# Altium PCB pcb-sensor-AD5933.PcbDoc
Units mm, origin at the board's own origin, x right, y up, seen from the top; angles counter-clockwise.
Board outline 53.59 x 49.4 mm, 2 copper layers (Top Layer, Bottom Layer); 28 components, 19 nets, 94 pads, 24 vias.
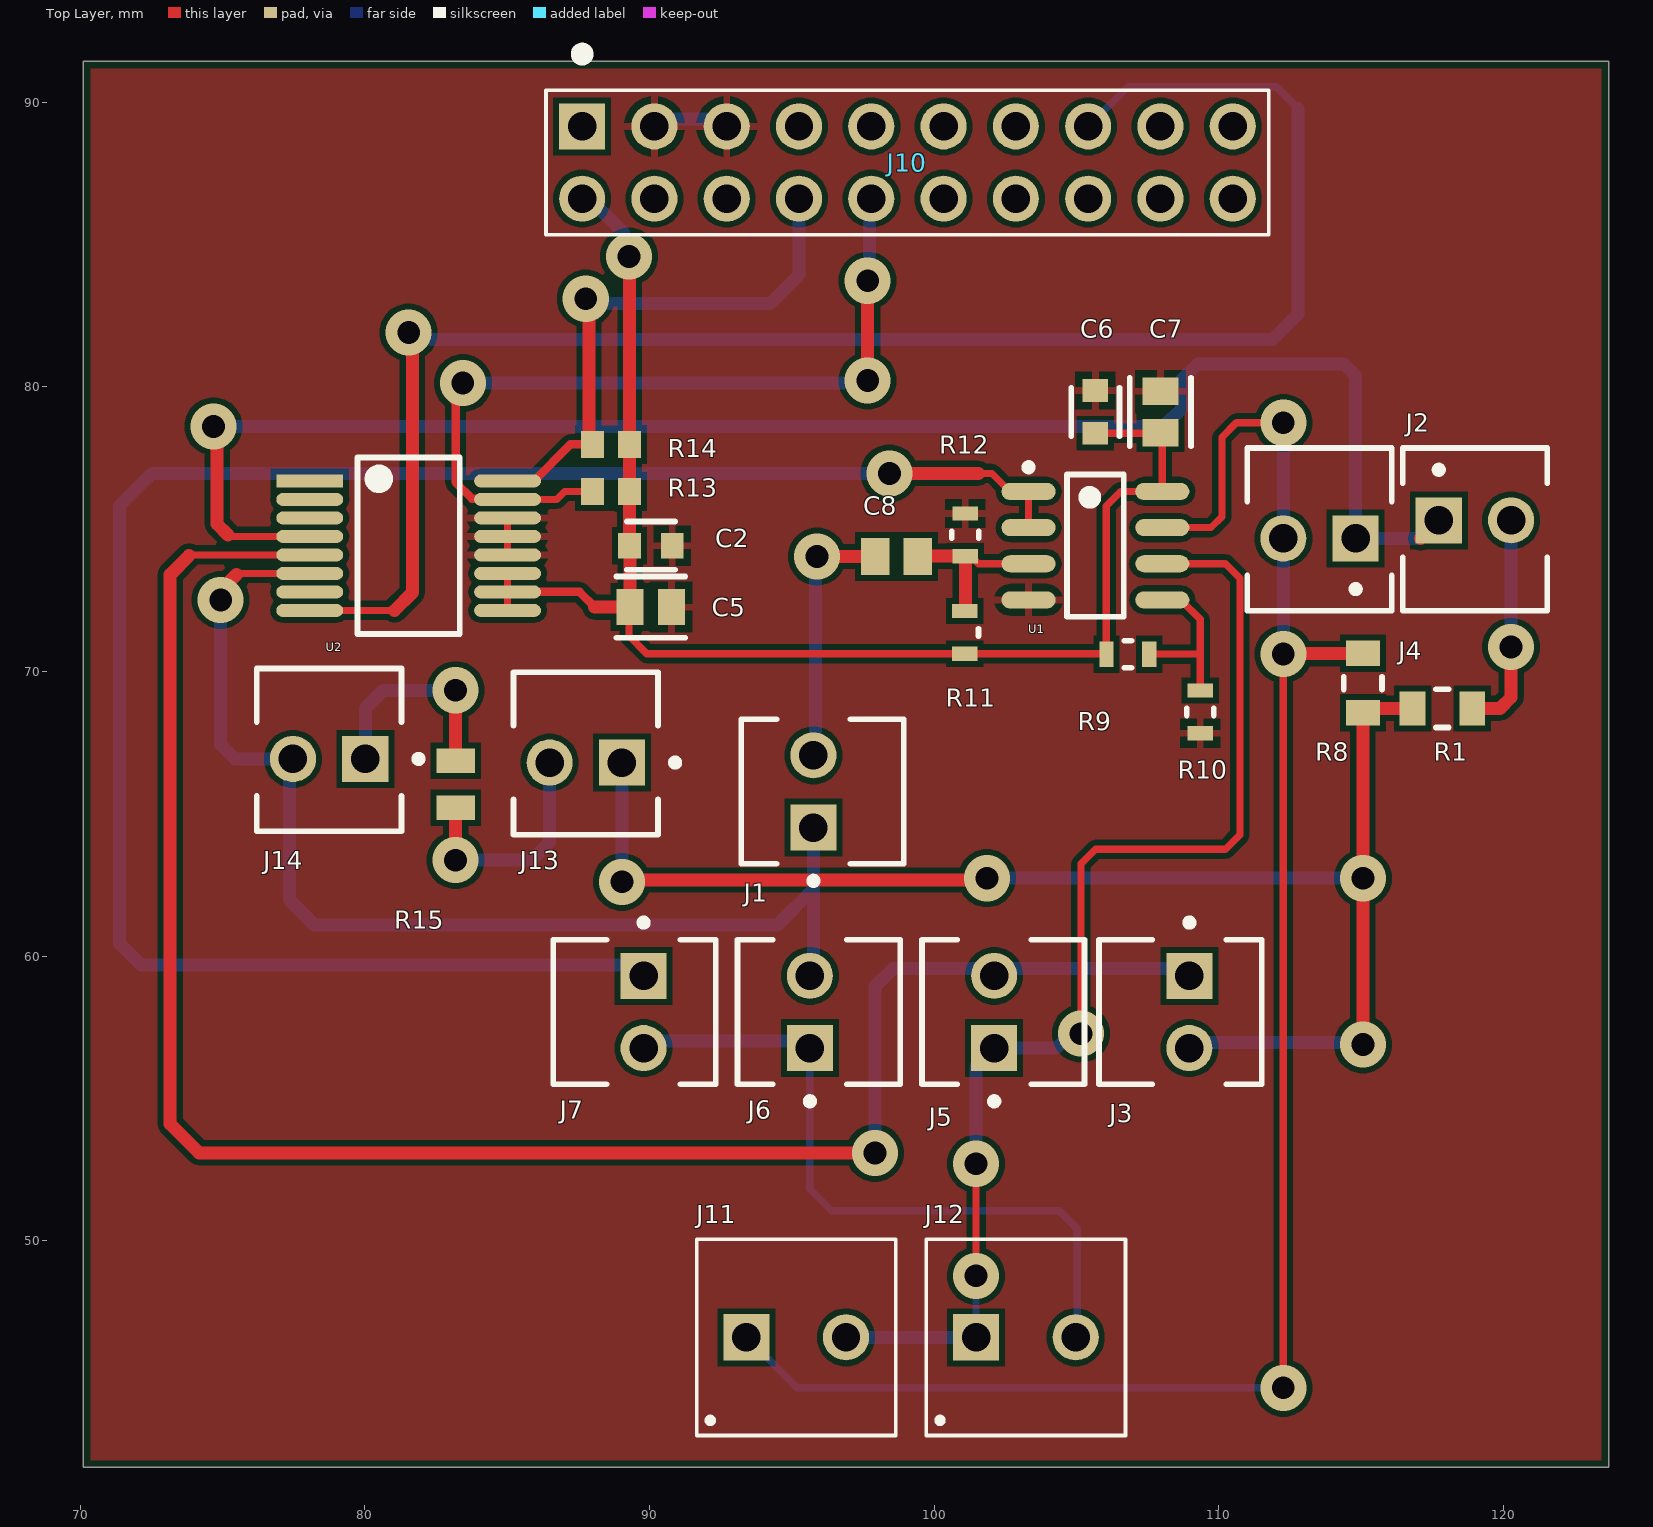
[diagram p0: Top Layer view]
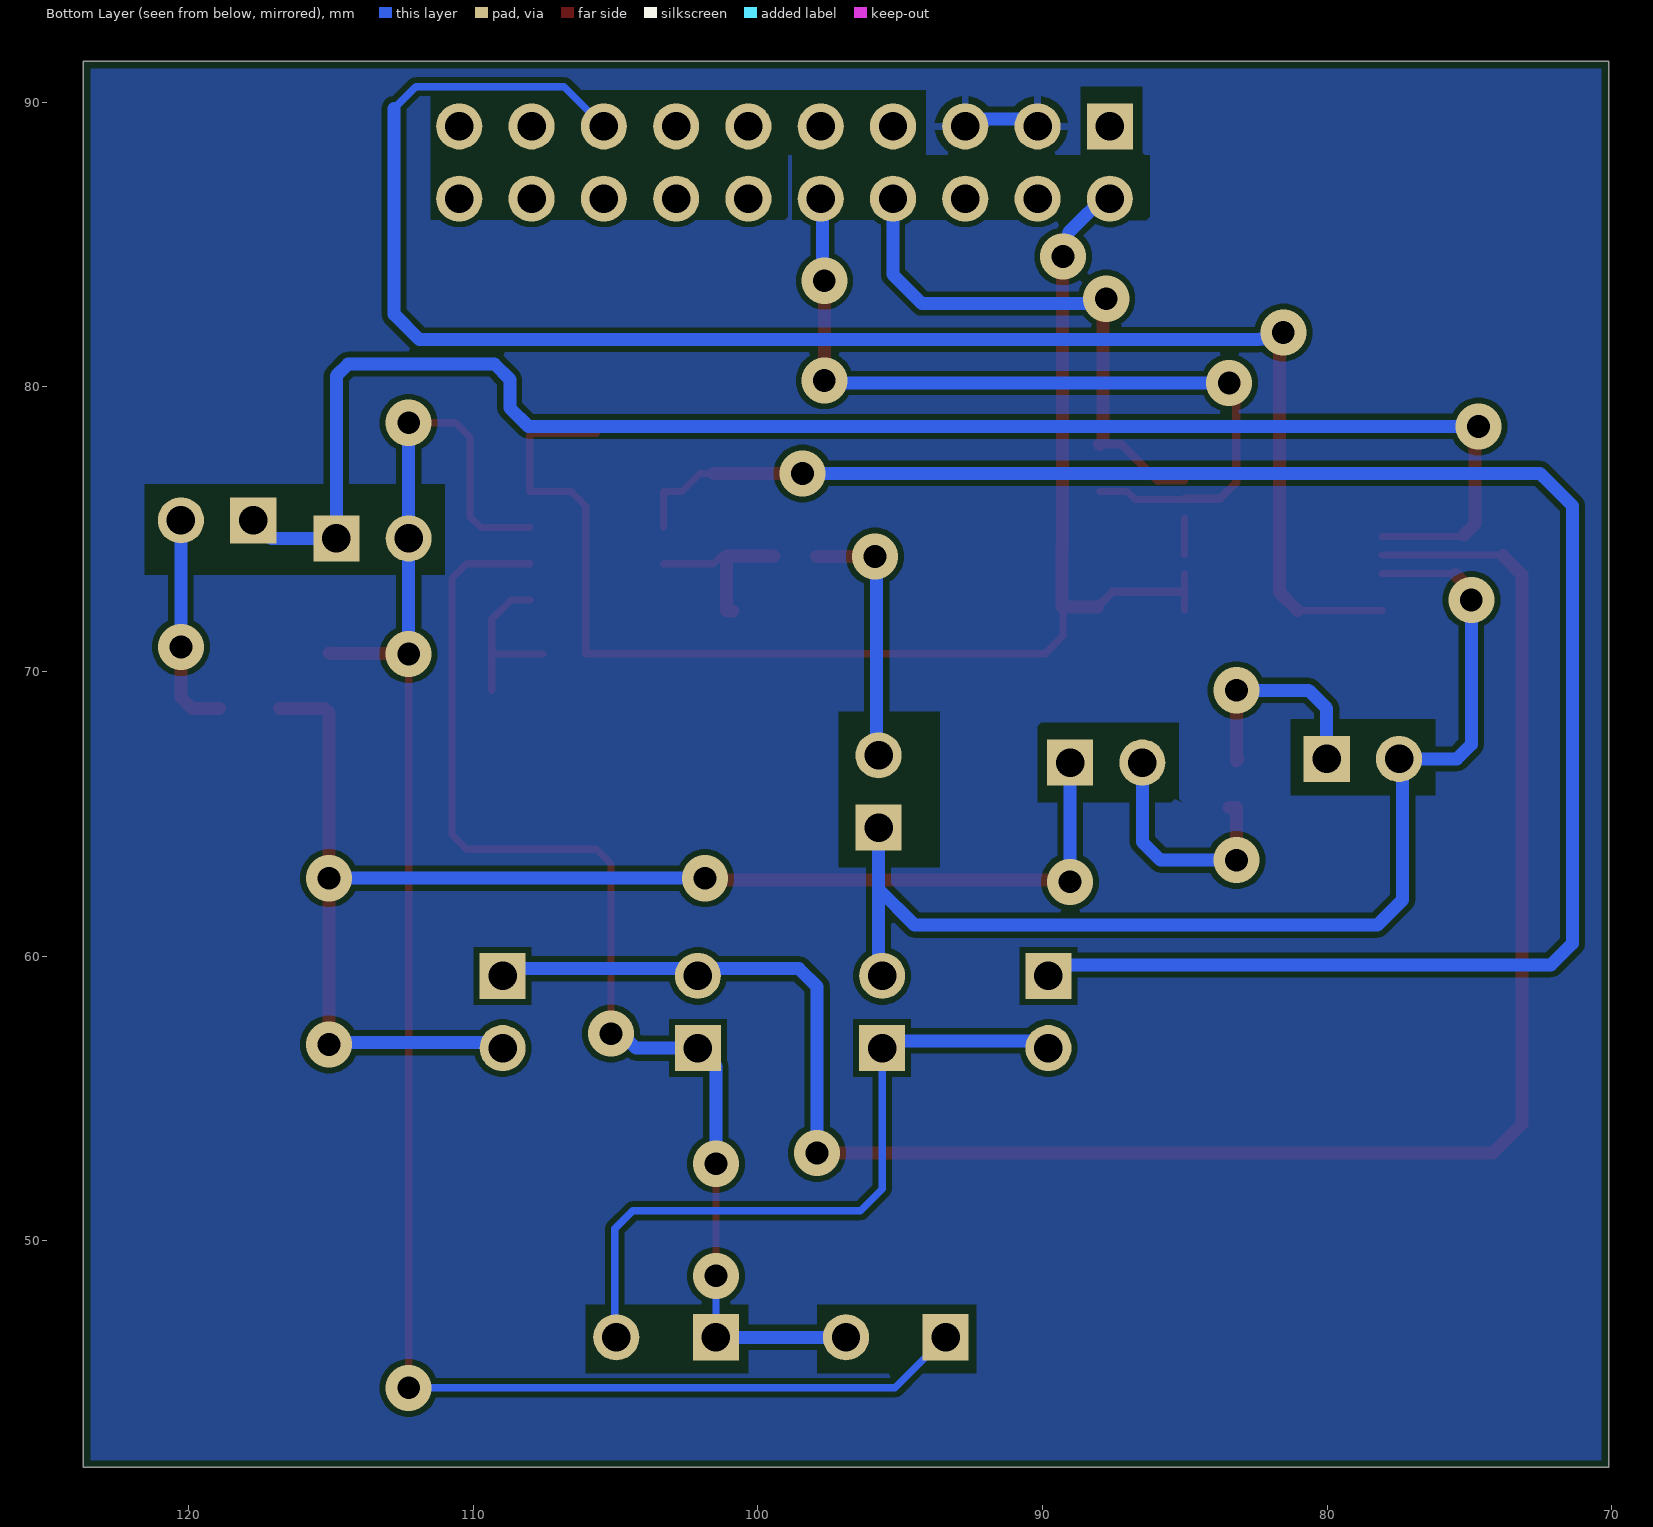
[diagram p1: Bottom Layer view, seen from below]
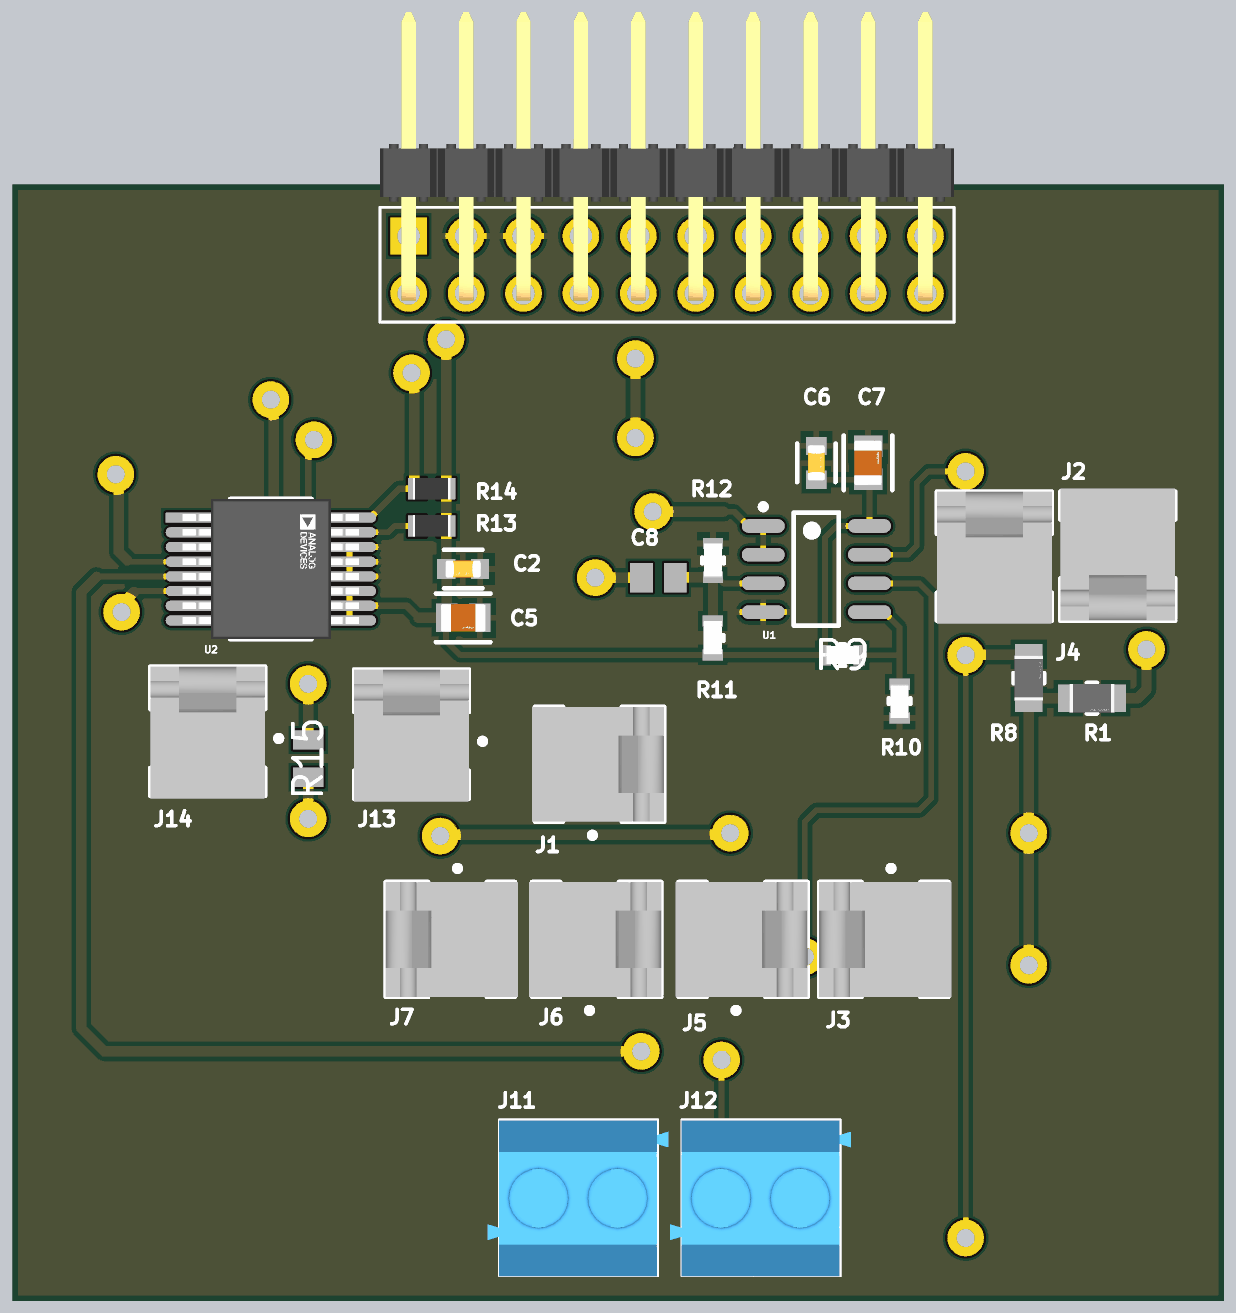
[diagram p2: 3D render of the assembled board from above, using the file's embedded part models]

## Layer stack, top to bottom
Top Solder: solder mask 0.0102, Solder Resist, Dk 3.5
Top Layer: signal copper 0.0356
Dielectric 1: dielectric 0.32, FR-4, Dk 4.8
Bottom Layer: signal copper 0.0356
Bottom Solder: solder mask 0.0102, Solder Resist, Dk 3.5

## Board outline
70.104,42.037 123.698,42.037 123.698,91.44 70.104,91.44

## Design rules (kind name [scope] priority, off if disabled: settings)
Clearance [All] p1: gap=0.2 ignorepadtopadclearanceinfootprint=FALSE
Clearance Clearance_U2 [TouchesRoom('AD5933WYRSZ-REEL7') OR InComponent('U2')] p2: gap=0.2 ignorepadtopadclearanceinfootprint=TRUE
Clearance Clearance_5 [InPolygon AND OnBottomLayer] p3: gap=0.2 ignorepadtopadclearanceinfootprint=FALSE
Clearance Clearance_4 [All] p4: gap=0.2 ignorepadtopadclearanceinfootprint=FALSE
Clearance Clearance_3 [All] p5: gap=0.4 ignorepadtopadclearanceinfootprint=FALSE
Clearance Clearance_2 [WithinRoom('AD5933')] p6: gap=0.2 ignorepadtopadclearanceinfootprint=FALSE
Clearance Clearance_1 [WithinRoom('AD8606')] p7: gap=0.2 ignorepadtopadclearanceinfootprint=FALSE
PolygonConnect [All] p1: connectstyle=Relief reliefconductorwidth=0.254 reliefentries=4 polygonreliefangle="90 Angle" airgapwidth=0.254
RoomDefinition esquematico-sensor-AD5933 [InComponentClass('esquematico-sensor-AD5933')] p1 off: confinementstyle=ConfineIn formatcopy=TRUE lockcomponents=FALSE outline 101.556,76.962 110.363,76.962 110.363,71.882 101.556,71.882
RoutingVias [All] p1: holewidth=0.8 width=1.62 viastyle="Through Hole" minholewidth=0.8 minwidth=1.62 maxholewidth=1 maxwidth=2
SolderMaskExpansion [All] p1: expansion=0.102 istentingtop=FALSE
Width [All] p1: maxlimit=1 minlimit=0.254 preferedwidth=0.254
30 further rules are at their usual default settings.

## Components (designator, comment, footprint, x,y, rotation, side; value= is the part's Value field where it differs from the comment)
C2 "CC0603KRX7R8BB104" FP-CC0603-DA-MFG 90.043,74.422 r0 top value="100 nF"
C5 "GRM21BR61C106KE15L" FP-GRM21B-0_1-IPC_C 90.043,72.263 r0 top
C6 "CC0603KRX7R8BB104" FP-CC0603-DA-MFG 105.664,79.121 r90 top value="100 nF"
C7 "GRM21BR61C106KE15L" FP-GRM21B-0_1-IPC_C 107.95,79.121 r90 top
C8 "GRM219R61A475KE34D" CAPC2013X95X45LL10T25 98.679,74.041 r0 top
J1 "" TECO-640456-2_V 95.758,65.786 r270 top
J2 "" TECO-640456-2_V 118.999,75.311 r180 top
J3 "" TECO-640456-2_V 108.966,58.039 r90 top
J4 "" TECO-640456-2_V 113.538,74.676 r0 top
J5 "" TECO-640456-2_V 102.108,58.039 r270 top
J6 "" TECO-640456-2_V 95.631,58.039 r270 top
J7 "" TECO-640456-2_V 89.789,58.039 r90 top
J10 "10129382-920002BLF" "Base Board Modular Connector (MALE)" 99.06,87.884 r180 top
J11 "" "Terminal Block 2-position" 93.401,46.609 r0 top
J12 "TB0011-350-02BE" "Terminal Block 2-position" 101.473,46.609 r0 top
J13 "" TECO-640456-2_V 87.757,66.802 r0 top
J14 "" TECO-640456-2_V 78.74,66.929 r0 top
R1 "AC0805FR-07107RL" FP-AC0805-MFG 117.856,68.707 r0 top value=107Ω
R8 "AC0805FR-07107RL" FP-AC0805-MFG 115.062,69.596 r90 top value=107Ω
R9 "" FP-TNPU0603-e3-MFG 106.807,70.612 r180 top
R10 "" FP-TNPU0603-e3-MFG 109.347,68.58 r90 top
R11 "" FP-TNPU0603-e3-MFG 101.08,71.374 r270 top
R12 "" FP-TNPU0603-e3-MFG 101.092,74.803 r270 top
R13 "CRCW060310K0FKEA" RESC1609X50X30NL8T20 88.646,76.327 r180 top
R14 "CRCW060310K0FKEA" RESC1609X50X30NL8T20 88.646,77.978 r0 top
R15 "CRCW08050000Z0EA" RESC2013X50X30LL20T20 83.185,66.04 r90 top
U1 "AD8606ARZ-REEL" ADI-R-8_L 105.664,74.422 r0 top
U2 "AD5933WYRSZ-REEL7" FP-RS-16-IPC_A 81.534,74.422 r0 top

## Footprints (in the part's own frame and the unit in brackets; to place one, negate y for a bottom-side part, rotate by r counter-clockwise, add the part's x,y. Pads: shape width x height; smd on the part's side, far side on the other; paste and mask are expansions set on the pad)
ADI-R-8_L [mm] "SOIC, 8-Leads, Body 4.9x3.9mm, Pitch 1.27mm, IPC High Density"
  oval 1.9x0.6 smd: 1(-2.35,1.905) 2(-2.35,0.635) 3(-2.35,-0.635) 4(-2.35,-1.905) 5(2.35,-1.905) 6(2.35,-0.635) 7(2.35,0.635) 8(2.35,1.905)
  silkscreen extent -2.47,-2.5 1,2.88, body extent -2,-2.5 2,2.5, height 1.75
"Base Board Modular Connector (MALE)" [mm] "10129382-920002BLF"
  rect 1.62x1.62 hole 1 mask+0.102: 1(11.43,-1.27)
  round 1.62 hole 1 mask+0.102: 2(8.89,-1.27) 3(6.35,-1.27) 4(3.81,-1.27) 5(1.27,-1.27) 6(-1.27,-1.27) 7(-3.81,-1.27) 8(-6.35,-1.27) 9(-8.89,-1.27) 10(-11.43,-1.27) 11(11.43,1.27) 12(8.89,1.27) 13(6.35,1.27) 14(3.81,1.27) 15(1.27,1.27) 16(-1.27,1.27) 17(-3.81,1.27) 18(-6.35,1.27) 19(-8.89,1.27) 20(-11.43,1.27)
  silkscreen extent -12.7,-4.01 12.7,2.54, body extent -12.7,-11.17 12.7,1.59, height 4.83
CAPC2013X95X45LL10T25 [mm] "Chip Capacitor, 2-Leads, Body 2.00x1.25mm, IPC High Density"
  rect 1x1.3 smd: 1(-0.75,0) 2(0.75,0)
  body extent -1.05,-0.67 1.05,0.68, height 0.95
FP-AC0805-MFG [mm]
  rect 0.9x1.2 smd paste+0 mask+0: 1(-1.05,0) 2(1.05,0)
  silkscreen extent -0.23,-0.67 0.23,0.67, body extent -1.6,-0.77 1.6,0.77, height 0.25
FP-CC0603-DA-MFG [mm]
  rect 0.8x0.9 smd paste+0 mask+0: 1(-0.75,0) 2(0.75,0)
  silkscreen extent -0.85,-0.85 0.85,0.85, body extent -1.35,-0.75 1.35,0.75, height 0.25
FP-GRM21B-0_1-IPC_C [mm]
  rect 0.958x1.262 smd paste+0 mask+0: 1(-0.727,0) 2(0.727,0)
  silkscreen extent -1.21,-1.07 1.21,1.07, body extent -1.31,-0.77 1.31,0.77, height 0.25
FP-RS-16-IPC_A [mm]
  rect 2.353x0.45 smd paste+0: 1(-3.475,2.275)
  rrect100% 2.353x0.45 smd paste+0: 2(-3.475,1.625) 3(-3.475,0.975) 4(-3.475,0.325) 5(-3.475,-0.325) 6(-3.475,-0.975) 7(-3.475,-1.625) 8(-3.475,-2.275) 9(3.475,-2.275) 10(3.475,-1.625) 11(3.475,-0.975) 12(3.475,-0.325) 13(3.475,0.325) 14(3.475,0.975) 15(3.475,1.625) 16(3.475,2.275)
  silkscreen extent -1.8,-3.1 1.8,3.1, body extent -5.15,-3.6 5.15,3.6, height 0.25
FP-TNPU0603-e3-MFG [mm]
  rect 0.5x0.9 smd paste+0 mask+0: 1(-0.75,0) 2(0.75,0)
  silkscreen extent -0.13,-0.48 0.13,0.48, body extent -1.1,-0.58 1.1,0.58, height 0.25
RESC1609X50X30NL8T20 [mm] "Chip Resistor, 2-Leads, Body 1.65x0.95mm, IPC Medium Density"
  rect 0.8x0.95 smd: 1(-0.65,0) 2(0.65,0)
  body extent -0.82,-0.48 0.82,0.48, height 0.5
RESC2013X50X30LL20T20 [mm] "Chip Resistor, 2-Leads, Body 2.00x1.25mm, IPC High Density"
  rect 0.85x1.35 smd: 1(-0.825,0) 2(0.825,0)
  body extent -1.1,-0.72 1.1,0.72, height 0.5
TECO-640456-2_V [mm] "HDR, 2-Leads, Body 5.715x5.08mm, Pitch 2.54mm"
  rect 1.62x1.62 hole 1: 1(1.27,0)
  round 1.62 hole 1: 2(-1.27,0)
  silkscreen extent -2.54,-2.54 3.26,3.18, body extent -2.54,-2.67 2.54,3.17, height 9.4
"Terminal Block 2-position" [mm]
  rect 1.62x1.62 hole 1 mask+0.102: 1(0,0)
  round 1.62 hole 1 mask+0.102: 2(3.5,0)
  silkscreen extent -1.75,-3.45 5.25,3.45, body extent -2.28,-3.47 5.72,3.43, height 8.5

## Part data
C2 C6: library part CMP-03422-000234-1, "CAP CER 0.1UF 25V X7R 0603", Capacitance="100 nF", Manufacturer=YAGEO, Package=CC0603-DA, Temperature="-55°C to +125°C", Temperature Characteristic=X7R, Temperature Coefficient=15%, Temperature Range High=+125°C, Temperature Range Low=-55°C, Tolerance=0.1, Voltage="25 V", Automotive=No, Category=Cap, ComponentLink2Description=Datasheet, ComponentLink2URL=http://www.yageo.com/documents/recent/UPY-GPHC_X7R_6.3V-to-50V_18.pdf, Device Class L1="Passive Components", Device Class L2=Capacitors, Device Class L3="Ceramic Capacitors", Digikey Description="CAP CER 0.1UF 25V X7R 0603", Footprint Url=http://www.yageo.com/exep/pages/download/literatures/UPY-C_GEN_24.pdf, Height=0.9mm, Lead Free=Yes, Manufacturer Part Number=CC0603KRX7R8BB104, Material=Ceramic, Mouser Description="CC Series 0603 0.1 uF 25 V ±10% Tolerance X7R SMT Multilayer Ceramic Capacitor", Octopart=https://octopart.com/cc0603krx7r8bb104-yageo-8376534, RoHS=TRUE, Voltage Rating="25 V"
C5 C7: library part CMP-2007-03453-2, "Chip Multilayer Ceramic Capacitors for General Purpose, 0805, 10uF, X5R, 15%, 10%, 16V", Capacitance=10uF, Case Code (Imperial)=0805, Case Code (Metric)=2012, Dielectric=X5R, Max Operating Temperature=85°C, Min Operating Temperature=-55°C, Package Quantity=1, Tolerance=10%, Voltage=16V, Case/Package=0805, Depth=1.25mm, Height=1.25mm, Lead Free="Lead Free", Length=2mm, Material=Ceramic, Mount="Surface Mount", packaging="Tape and Reel", Radiation Hardening=No, REACH SVHC="No SVHC", Termination=SMD/SMT, Thickness=0.053inch, Voltage Rating=16V, Voltage Rating (DC)=16V, Width=1.25mm
C8: library part CMP-2007-00178-1, Manufacturer=Murata, Part Number=GRM219R61A475KE34D
J1 J2 J3 J4 J5 J6 J7 J13 J14: library part CMP-2000-05417-1, "Male Header, Pitch 2.54 mm, 1 x 2 Position, Height 10.49 mm, Tail Length 3.556 mm, -55 to 105 degC, RoHS, Bulk", Color=White, Current, Rating="5 /  / A", Flammability Rating=UL94V-0, Manufacturer="TE Connectivity", Temperature, Operating="-55to+105 /  / degC", Voltage, Rating="250 /  / V", Agency Approvals=CSA,UL, Angle=Straight, Brand/Series=MTA-100Series, Color, Housing=White, Connector Type=MTA-100, Contact Centerline Spacing="0.100 /  / in.", Contact Mating Area Plating=Tin, Contact Plating=Tin, Contact Shape=Square, Contact Termination Area Plating=Tin, Datasheet URL=https://datasheet.ciiva.com/11746/0900766b80eb7fdd-11746365.pdf, Datasheet Version="Rev. W, 06/2004", Length, Overall="0.2 /  / \"", Length, Pin="0.14 /  / \"", Length, Terminal Post="0.14 /  / in.", Manufacturer URL=http://www.te.com/, Material, Contact=CopperAlloy, Material, Housing=Polyester, Mount Angle=Vertical, Mounting Hole Size="0.04 /  / \"", Mounting Type=PCMount, Number of Contacts=2, Number of Positions=2, Number of Rows=1, Pin Spacing="0.1 /  / \"", Primary Type=InterconnectSystem, Size, Post="0.025 /  / in.", Special Features=Pinstrip, Standards=RoHSCompliant,ELVCompliant,UL94V-0, Termination=Solder, Type=PCBPlug
J10: library part "Base Board Modular Connector (MALE)"
J11: library part TB0011-350-02BE, "Fixed Terminal Blocks 2 Poles, Screw Type, Horizontal, 3.50 Pitch, 24-18 (AWG), Blue, Terminal Block Connector", Supplier Part Number 1=2223-TB0011-350-02BE-ND, Supplier 1=DigiKey, Supplier 2=Mouser, Supplier 3=Farnell, Supplier Part Number 2=179-TB0011-350-02BE, Supplier Part Number 3=TB0011-350-02BE
J12: "Fixed Terminal Blocks 2 Poles, Screw Type, Horizontal, 3.50 Pitch, 24-18 (AWG), Blue, Terminal Block Connector", Supplier Part Number 1=2223-TB0011-350-02BE-ND, Supplier 1=DigiKey, Supplier 2=Mouser, Supplier 3=Farnell, Supplier Part Number 2=179-TB0011-350-02BE, Supplier Part Number 3=TB0011-350-02BE
R1 R8: library part CMP-03412-037308-1, "Res SMD 107 Ohm 1% 1/8W 0805", Manufacturer=Yageo, Package=AC0805, Power Rating=1/8W, Resistance=107Ω, Temperature="-55°C to +155°C", Temperature Range High=+155°C, Temperature Range Low=-55°C, Tolerance=0.01, Voltage Rating=150V, Automotive=Yes, Automotive Grade="Grade 0", Category=Res, ComponentLink2Description=Datasheet, ComponentLink2URL=http://www.yageo.com/documents/recent/PYu-AC_51_RoHS_L_6.pdf, Composition="Thick Film", Device Class L1="Passive Components", Device Class L2=Resistors, Device Class L3="Chip SMD Resistors", Digikey Description="Res SMD 107 Ohm 1% 1/8W 0805", Footprint Url=http://www.yageo.com/exep/pages/download/literatures/PYu-R_Mount_10.pdf, Height=0.6mm, Ipc Land Pattern Name=RESC200125X50, Lead Free=Yes, Manufacturer Part Number=AC0805FR-07107RL, Octopart=https://octopart.com/ac0805fr-07107rl-yageo-71367522, RoHS=TRUE, Series=AC
R9 R10 R11 R12: library part CMP-02407-013067-1, "RES SMD 50K OHM 0.02% 1/10W 0603", Case Code (Imperial)=0603, Case Code (Metric)=1608, Max Operating Temperature=125°C, Max Power Dissipation=100mW, Min Operating Temperature=-55°C, Resistance=50kR, Resistor Type="Thin Film", Temperature Coefficient=5ppm/°C, Tolerance=0.02%, Case/Package=0603, Features="Moisture Resistant", Number of Terminations=2, packaging="Cut Tape"
R13 R14: library part CMP-1666-00005-4, "Chip Resistor, 10 KOhm, +/- 1%, 100 mW, -55 to 155 degC, 0603 (1608 Metric), RoHS, Tape and Reel", Manufacturer="Vishay Semiconductor", Max Operating Temperature="155 degC", Min Operating Temperature="-55 degC", Package Quantity=5000, Voltage Rating="75 V", ComponentLink1Description="Manufacturer URL", ComponentLink1URL=http://www.vishay.com/, ComponentLink2Description=Datasheet, ComponentLink2URL=https://datasheet.ciiva.com/11809/0900766b80d98afc-11809037.pdf, DatasheetVersion=06/2012, Height="0.45 mm", Length="1.55 mm", Mounting Technology="Surface Mount", PackageDescription="2-Pin Surface Mount Device, Body 1.575 x 0.85 mm", PackageReference=0603, packaging="Tape and Reel", REACH SVHC=Unknown, RoHSCompliant=true
R15: library part CMP-2001-04896-1, Manufacturer="Vishay Dale", Part Number=CRCW08050000Z0EA
U1: library part CMP-0384-01320-2, "Double Channel Wide Bandwidth Operational Amplifier, 10 MHz BW, 5 V/us SR, Industrial, 8-pin SOIC (R-8), Reel", Amplifiers Per Package=2, Generic Part Number=AD8606, Input Bias Current=200fA, Input Offset Voltage=20uV, Manufacturer="Analog Devices", Code_JEDEC=MS-012-AA, ComponentLink1Description="Manufacturer URL", ComponentLink1URL=http://www.analog.com/en/index.html, ComponentLink2Description=Datasheet, ComponentLink2URL=http://www.analog.com/static/imported-files/data_sheets/AD8605_8606_8608.pdf, ComponentLink3Description="Package Specification", ComponentLink3URL=http://www.analog.com/static/imported-files/packages/PKG_PDF/SOIC_Narrow%20(R)/R_8.pdf, ComponentLink4Description="Reference Circuit", ComponentLink4URL=http://www.analog.com/en/all-operational-amplifiers-op-amps/operational-amplifiers-op-amps/ad8606/products/product.html#product-recommendations, DatasheetVersion="Rev. L", Iq/Amp=1.2mA, Mounting Technology="Surface Mount", PackageDescription="8-Pin Standard Small Outline Package, Body 3.9 x 4.9 mm, Pitch 1.27 mm", PackageReference=R-8, PackageVersion=060506-A, PartNumber=AD8606ARZ-REEL, RevisionNote="Reference Circuit URL fixed", Slew Rate=5V/us, Small Signal Bandwidth=10MHz, V Span Max=6V, V Span Min=2.7V
U2: library part CMP-09111-000002-1, "12BIT 1 MSPS, IMPEDANCE CONVERTE", Frequency=16.776MHz, Nominal Supply Current=15mA, Accuracy=0.5%, Lead Free="Contains Lead", Number of Pins=16, Operating Supply Current=15mA, Resolution=12b, RoHS Compliant=Yes, Sampling Rate=1MS/s

## Via types
v1: diameter 1.62/1.62 (per signal layer), hole 0.8, Top Layer to Bottom Layer, 24 vias

## Nets (pads, with @x,y where several pads share a name; then routed paths per layer and width w, separated by ;. In a path a pad name is that pad's centre, name@x,y a point inside that pad or via, vN(x,y) a via of type N, cw(c..) or ccw(c..) an arc to the next point about the centre after c; other vN are vias at no path point)
3V3: C2.1 C5.1 C6.1 C7.1 J10.11 R9.2 R11.2 R13.1 R14.2 U1.8 U2.9 U2.10 U2.11 | length 50
  Top Layer w0.254: U2.9 U2.10 U2.11 ; C5.1 89.281,72.228 89.281,71.247 89.904,70.624 R11.2 R9.2@106.045,70.624 ; C6.1 107.927,78.371 C7.1 108.014,78.33 U1.8 106.553,76.327 106.045,75.819 R9.2@106.045,70.624 ; R9.2 R9.2@106.045,70.624
  Top Layer w0.3: U2.10 87.537,72.797 88.071,72.263
  Top Layer w0.457: 88.071,72.263 C5.1 89.316,74.399 C2.1 89.293,75.577 89.296,75.58 R13.1 v1@89.296,84.567
  Bottom Layer w0.457: J10.11@87.63,86.868 89.087,85.411
  other v1: 89.281,84.582
GND: C2.2 C5.2 C6.2 C7.2 J10.2 J10.3 R10.1 R12.1 U1.4 U2.12 U2.13 U2.14 | length 3.8
  Top Layer w0.254: U2.12 U2.13 U2.14
  Bottom Layer w0.457: J10.2@90.17,89.408 J10.3@92.71,89.408
NetC8_1: C8.1 J1.2 | length 9.1
  Top Layer w0.457: v1(95.885,74.041) C8.1
  Bottom Layer w0.457: J1.2 95.822,67.12 95.822,73.977 v1(95.885,74.041)
NetC8_2: C8.2 R11.1 R12.2 U1.3 | length 6.1
  Top Layer w0.254: R12.2 101.292,74.053 101.558,73.787 U1.3
  Top Layer w0.457: C8.2 99.441,74.053 R12.2 101.092,72.136 R11.1 R11.1@100.88,72.124
NetJ1_1: J1.1 J6.2 J14.2 U2.6 | length 41.1
  Top Layer w0.254: 75.482,73.406 75.523,73.447 U2.6
  Top Layer w0.457: v1@74.93,72.644 74.952,72.666 74.952,72.876 75.482,73.406 ; J1.1@95.504,64.262 J1.1
  Bottom Layer w0.457: v1(74.93,72.517) 74.93,67.437 75.438,66.929 J14.2 77.343,66.802 77.343,61.976 78.232,61.087 94.488,61.087 95.758,62.357 ; J6.2@95.631,59.563 95.758,59.69 95.758,62.357 ; J1.1 95.758,62.357
NetJ2_1: J2.1 J4.1 U2.4 | length 58.5
  Top Layer w0.254: 75.184,74.803 75.24,74.747 U2.4
  Top Layer w0.457: v1(74.676,78.613) 74.803,78.486 74.803,75.184 75.184,74.803 ; J2.1@117.094,74.676 J2.1
  Bottom Layer w0.457: v1(74.676,78.613) 108.063,78.613 108.712,79.262 108.712,80.264 109.252,80.804 114.395,80.804 114.808,80.391 J4.1 117.094,74.676 J2.1
NetJ2_2: J2.2 R1.2 | length 7.7
  Top Layer w0.457: R1.2 119.888,68.707 120.269,69.088 v1(120.269,70.866)
  Bottom Layer w0.457: v1(120.269,70.866) J2.2
NetJ3_1: J3.1 J5.2 U2.5 | length 66.7
  Top Layer w0.254: 73.821,74.075 73.843,74.097 U2.5
  Top Layer w0.457: 73.821,74.075 73.152,73.406 73.152,54.102 74.168,53.086 v1(97.917,53.086)
  Bottom Layer w0.457: v1(97.917,53.086) 97.917,58.928 98.552,59.563 J3.1@108.839,59.563
NetJ3_2: J3.2 J13.1 R1.1 R8.1 | length 50
  Top Layer w0.457: v1(89.027,62.611) 89.09,62.674 101.79,62.674 v1(101.854,62.738) ; v1(115.062,56.896) R8.1 115.223,68.707 R1.1
  Bottom Layer w0.457: v1(89.027,62.611) J13.1 ; v1(101.854,62.738) v1(115.062,62.738) ; J3.2@108.712,57.023 J3.2@108.775,56.959 ; J3.2@108.902,56.959 114.998,56.959 v1(115.062,56.896)
NetJ4_2: J4.2 J11.1 R8.2 U1.7 | length 64.2
  Top Layer w0.254: U1.7 109.728,75.057 110.109,75.438 110.109,78.232 110.617,78.74 v1(112.268,78.74) ; J4.2@111.898,74.676 J4.2 ; v1(112.268,44.831) v1(112.268,70.612)
  Top Layer w0.457: J11.1@93.345,46.553 J11.1 ; J4.2@112.233,74.711 J4.2 ; v1(112.268,70.612) 112.285,70.629 115.045,70.629 R8.2
  Bottom Layer w0.254: J11.1 95.179,44.831 v1(112.268,44.831)
  Bottom Layer w0.457: v1(112.268,70.612) J4.2 v1(112.268,78.74)
NetJ5_1: J5.1 J11.2 J12.1 U1.6 | length 42.5
  Top Layer w0.254: v1(101.473,48.768) v1(101.473,52.705) ; v1(105.156,57.277) 105.156,63.246 105.664,63.754 110.236,63.754 110.744,64.262 110.744,73.279 110.236,73.787 U1.6
  Top Layer w0.457: J12.1 J12.1@101.727,46.863
  Bottom Layer w0.254: J12.1 v1(101.473,48.768)
  Bottom Layer w0.457: J11.2 J12.1 ; v1(101.473,52.705) 101.473,56.134 J5.1 104.278,56.769 104.786,57.277 v1(105.156,57.277)
NetJ6_1: J6.1 J7.2 J12.2 | length 24.5
  Bottom Layer w0.254: J6.1 95.631,51.816 96.393,51.054 104.394,51.054 105.029,50.419 105.029,46.665 J12.2
  Bottom Layer w0.457: J7.2@90.043,57.023 95.631,57.023 J6.1@95.758,56.896
NetJ7_1: J7.1 U1.1 U1.2 | length 68.4
  Top Layer w0.254: 101.556,76.962 102.029,76.962 102.664,76.327 U1.1 U1.2
  Top Layer w0.457: v1(98.425,76.962) 101.556,76.962
  Bottom Layer w0.457: J7.1@90.043,59.563 89.916,59.69 72.136,59.69 71.374,60.452 71.374,75.819 72.39,76.835 72.517,76.962 v1(98.425,76.962)
NetJ10_8: J10.8 U2.8 | length 60.7
  Top Layer w0.254: U2.8 81.037,72.147
  Top Layer w0.457: 81.037,72.147 81.661,72.771 81.661,81.788 v1(81.534,81.915) ; J10.8@105.178,89.64 J10.8@105.41,89.408
  Bottom Layer w0.254: J10.8 106.807,90.551 112.014,90.551 112.776,89.789
  Bottom Layer w0.3: 112.713,89.852 112.776,89.789
  Bottom Layer w0.457: v1(81.534,81.915) 81.756,81.693 82.352,81.693 82.383,81.661 111.887,81.661 112.776,82.55 112.776,89.789
NetJ10_14: J10.14 R14.1 U2.16 | length 19.6
  Top Layer w0.254: U2.16 U2.16@85.934,76.697
  Top Layer w0.3: U2.16@85.934,76.697 87.215,77.978 R14.1
  Top Layer w0.457: v1(87.757,83.1) 87.876,82.98 87.876,78.097 R14.1
  Bottom Layer w0.457: v1(87.757,83.1) 87.926,82.931 94.234,82.931 95.25,83.947 J10.14@95.25,86.868
NetJ10_15: J10.15 R13.2 U2.15 | length 29.7
  Top Layer w0.254: U2.15 86.735,76.047 87.015,76.327 R13.2
  Top Layer w0.3: v1@83.185,79.568 83.185,76.645 83.755,76.076 84.98,76.076 U2.15
  Top Layer w0.457: v1@83.185,79.568 83.439,79.822 v1(83.439,80.137) ; v1(97.663,80.222) v1(97.663,83.73)
  Bottom Layer w0.457: v1(83.439,80.137) 97.578,80.137 v1(97.663,80.222) ; v1(97.663,83.73) 97.727,83.794 97.727,86.804 J10.15@97.79,86.868
NetJ13_2: J13.2 R15.1 | length 8.5
  Top Layer w0.457: v1(83.185,63.373) R15.1 R15.1@83.435,65.215
  Bottom Layer w0.457: v1(83.185,63.373) 85.852,63.373 86.487,64.008 J13.2
NetJ14_1: J14.1 R15.2 | length 7.8
  Top Layer w0.457: R15.2@83.121,66.929 R15.2 v1(83.185,69.342)
  Bottom Layer w0.457: J14.1 80.01,68.707 80.645,69.342 v1(83.185,69.342)
NetR9_1: R9.1 R10.2 U1.5 | length 5.9
  Top Layer w0.254: R9.1 109.317,70.612 109.347,70.582 ; U1.5 108.664,72.517 109.347,71.834 109.347,70.582 ; R10.2 109.347,70.582
pads on no net: J10.1 J10.4 J10.5 J10.6 J10.7 J10.9 J10.10 J10.12 J10.13 J10.16 J10.17 J10.18 J10.19 J10.20 U2.1 U2.2 U2.3 U2.7

## Polygon pours and split planes (outlines as drawn)
GND on Bottom Layer "GND_L02_P000" (solid, pour order 0): 70.358,91.186 123.444,91.186 123.444,42.291 70.358,42.291
GND on Top Layer "GND_L01_P001" (solid, pour order 1): 70.358,91.186 123.444,91.186 123.444,42.291 70.358,42.291

## Other copper
Bottom Layer:
  pour cut-out: 92.329,47.752 97.917,47.752 97.917,45.339 92.329,45.339
  pour cut-out: 100.33,47.752 106.045,47.752 106.045,45.339 100.33,45.339
  pour cut-out: 86.487,90.551 88.646,90.551 88.646,88.265 86.487,88.265
  pour cut-out: 86.487,90.551 88.646,90.551 88.646,88.265 86.487,88.265
  pour cut-out: 94.107,90.424 111.506,90.424 111.506,88.138 94.107,88.138
  pour cut-out: 98.933,88.138 111.506,88.138 111.506,85.852 99.06,85.852 98.933,85.979
  pour cut-out: 104.14,90.424 106.553,90.424 106.553,88.265 104.14,88.265
  pour cut-out: 86.233,88.138 98.806,88.138 98.806,85.852 86.36,85.852 86.233,85.979
  pour cut-out: 93.599,68.58 97.155,68.58 97.155,63.119 93.599,63.119
  pour cut-out: 85.09,65.405 85.217,65.532 85.344,65.532
  pour cut-out: 85.217,68.199 90.043,68.199 90.17,68.072 90.17,65.405 85.471,65.405 85.217,65.659
  pour cut-out: 76.2,68.326 81.28,68.326 81.28,65.659 76.2,65.659
  pour cut-out: 121.539,76.581 110.998,76.581 110.998,73.406 121.539,73.406

## Silkscreen, mask and mechanical layers (free items; w line width, h text height)
Mechanical 1:
  the board outline again, w0.254

## Text inside footprints (layer, text, board x,y; h text height)
J10: Top Component Center "I2C_ADDR" at 99.758,84.686 h1 r270; Top Component Center "PWM / GPIO" at 104.798,84.686 h1 r270; Top Component Center "SPI" at 98.368,100.561 h1 r180; Top Component Center "I2C" at 100.312,75.542 h1 r180; Top Component Center "POWER" at 85.829,85.621 h1 r90; Top Component Center "I2C_SCL" at 94.678,84.686 h1 r270; Top Component Center "SPI_CLK" at 95.822,91.082 h1 r90; Top Component Center "SPI_MISO" at 103.442,91.082 h1 r90; Top Component Center "+5V" at 88.369,91.082 h1 r90; Top Component Center "GND" at 93.449,91.082 h1 r90; Top Component Center "SPI_CS" at 98.362,91.082 h1 r90; Top Component Center "SPI_MOSI/SDIO" at 100.902,91.082 h1 r90; Top Component Center "GND" at 90.909,91.082 h1 r90; Top Component Center "I2C_ALRT" at 103.695,77.955 h1 r270; Top Component Center "I2C_SDA" at 97.218,84.686 h1 r270; Top Component Center "+3V3" at 86.891,84.686 h1 r270; Top Component Center "+2V5" at 89.431,84.686 h1 r270; Top Component Center "-2V5" at 91.971,84.686 h1 r270; Top Component Center "PWM / GPIO" at 105.895,91.082 h1 r90; Top Component Center "PWM / GPIO" at 108.435,91.082 h1 r90; Top Component Center "PWM / GPIO" at 110.975,91.082 h1 r90; Top Component Center "PWM / GPIO" at 107.338,84.686 h1 r270; Top Component Center "PWM / GPIO" at 109.878,84.686 h1 r270